# Altium PCB MACH_VXL.PcbDoc
Units mm, origin at the board's own origin, x right, y up, seen from the top; angles counter-clockwise.
Board outline 96.27 x 82.04 mm, 2 copper layers (Top Layer, Bottom Layer); 22 components, 27 nets, 107 pads, 9 vias.
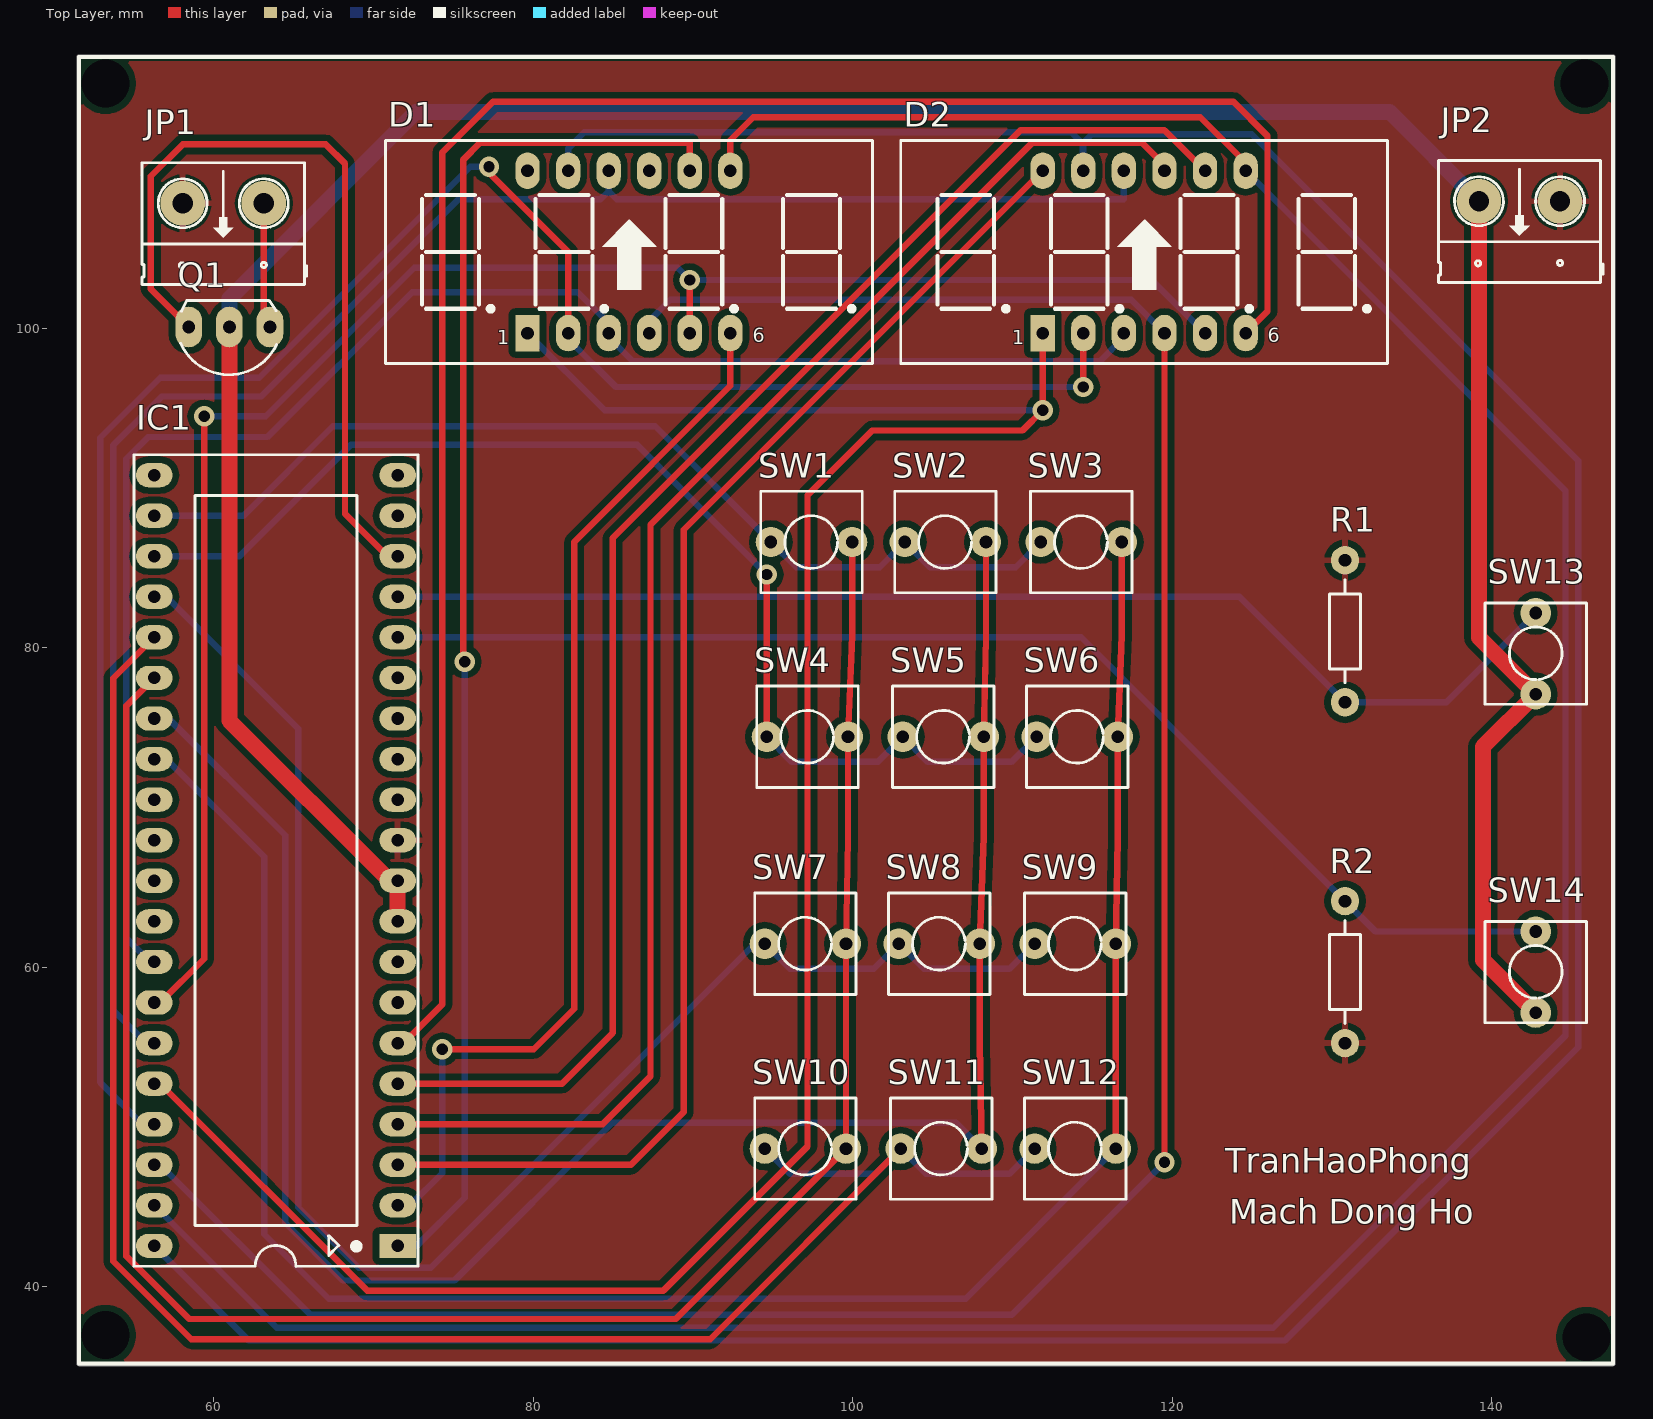
[diagram p0: Top Layer view]
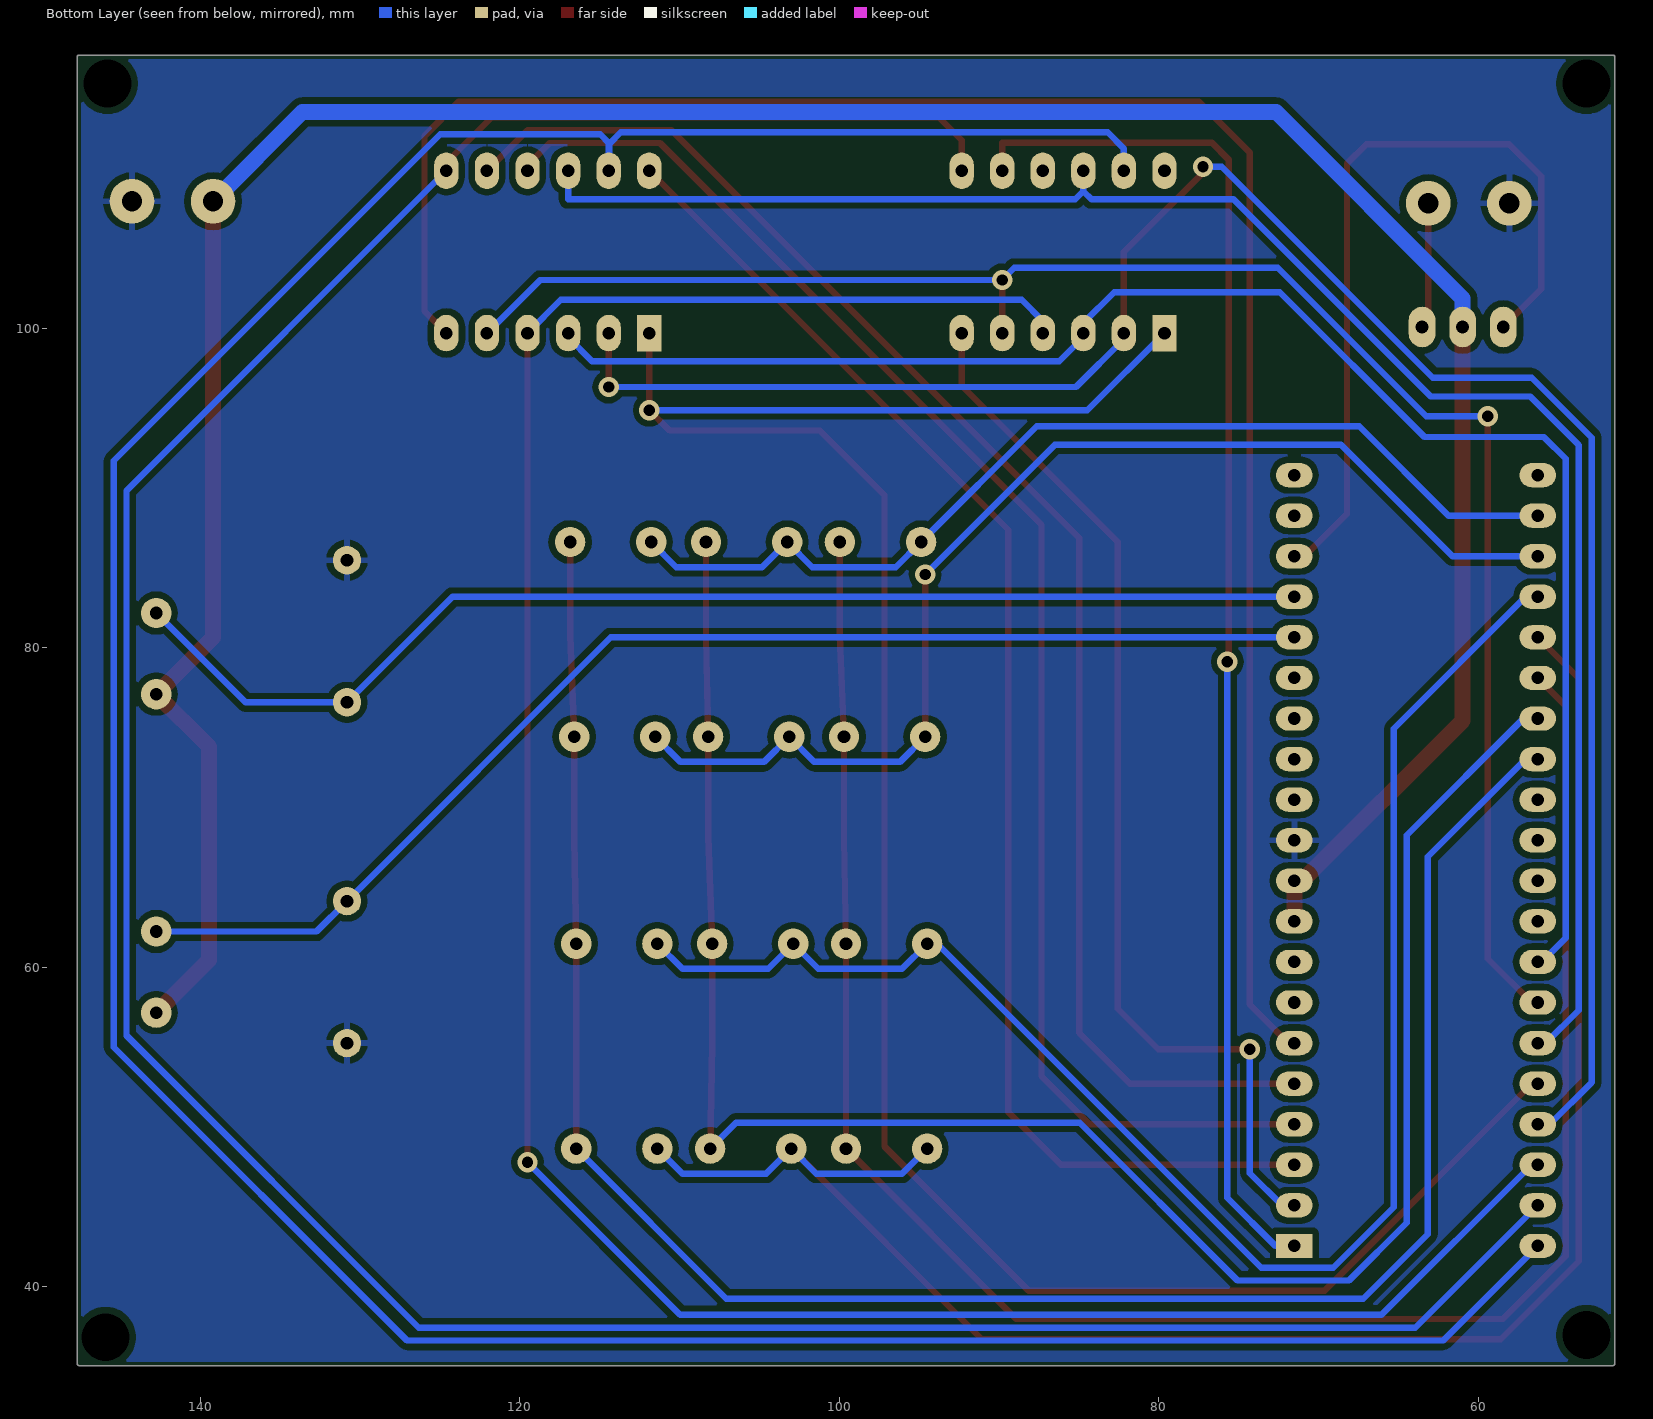
[diagram p1: Bottom Layer view, seen from below]

## Layer stack, top to bottom
Top Solder: solder mask 0.0102, Solder Resist, Dk 3.5
Top Layer: signal copper 0.0356
Dielectric 1: dielectric 0.32, FR-4, Dk 4.8
Bottom Layer: signal copper 0.0356
Bottom Solder: solder mask 0.0102, Solder Resist, Dk 3.5

## Board outline
51.435,35.179 ccw(c51.562,35.179) 51.562,35.052 147.574,35.052 ccw(c147.574,35.179) 147.701,35.179 147.701,116.967 ccw(c147.574,116.967) 147.574,117.094 51.562,117.094 ccw(c51.562,116.967) 51.435,116.967

## Design rules (kind name [scope] priority, off if disabled: settings)
Clearance [All] p1: gap=0.4 ignorepadtopadclearanceinfootprint=FALSE
PolygonConnect [InNet('GND')] p1: connectstyle=Relief reliefconductorwidth=0.4 reliefentries=4 polygonreliefangle="90 Angle" airgapwidth=0.4
RoutingVias [All] p1: holewidth=0.711 width=1.27 viastyle="Through Hole" minholewidth=0.711 minwidth=1.27 maxholewidth=0.711 maxwidth=1.27
SolderMaskExpansion [All] p1: expansion=0.102
Width [All] p1: maxlimit=1 minlimit=0.4 preferedwidth=0.4
30 further rules are at their usual default settings.

## Components (designator, comment, footprint, x,y, rotation, side; value= is the part's Value field where it differs from the comment)
D1 "" LED7SEG-4-0.36 86.106,105.029 r0 top
D2 "" LED7SEG-4-0.36 118.364,105.029 r0 top
IC1 "ATMEL 16L" DIP40/W0.6 71.501,42.545 r90 top value="Atmega 16L"
JP1 "Header 2_1" HED2 63.119,107.823 r180 top value="Header 2"
JP2 "Header 2_1" HED2 144.272,107.95 r180 top value="Header 2"
Q1 "C1815" QTO-92 60.96,100.076 r180 top
R1 "1k" R1/4W 130.81,85.471 r270 top value="R1/4W - 1K"
R2 "1k" R1/4W 130.81,55.245 r90 top value="R1/4W - 1K"
SW1 "SW" SW2 94.869,86.614 r0 top value="SW chip 2 pin"
SW2 "SW" SW2 103.251,86.614 r0 top value="SW chip 2 pin"
SW3 "SW" SW2 111.76,86.614 r0 top value="SW chip 2 pin"
SW4 "SW" SW2 94.615,74.422 r0 top value="SW chip 2 pin"
SW5 "SW" SW2 103.124,74.422 r0 top value="SW chip 2 pin"
SW6 "SW" SW2 111.506,74.422 r0 top value="SW chip 2 pin"
SW7 "SW" SW2 94.488,61.468 r0 top value="SW chip 2 pin"
SW8 "SW" SW2 102.87,61.468 r0 top value="SW chip 2 pin"
SW9 "SW" SW2 111.379,61.468 r0 top value="SW chip 2 pin"
SW10 "SW" SW2 94.488,48.641 r0 top value="SW chip 2 pin"
SW11 "SW" SW2 102.997,48.641 r0 top value="SW chip 2 pin"
SW12 "SW" SW2 111.379,48.641 r0 top value="SW chip 2 pin"
SW13 "SW" SW2 142.748,82.169 r270 top value="SW chip 2 pin"
SW14 "SW" SW2 142.748,62.23 r270 top value="SW chip 2 pin"

## Footprints (in the part's own frame and the unit in brackets; to place one, negate y for a bottom-side part, rotate by r counter-clockwise, add the part's x,y. Pads: shape width x height; smd on the part's side, far side on the other; paste and mask are expansions set on the pad)
DIP40/W0.6 [mil] "40 PIN, W 600mil, Pin to pin 100mil"
  rect 60x90 hole 31: 1(0,0)
  oval 60x90 hole 31: 2(100,0) 3(200,0) 4(300,0) 5(400,0) 6(500,0) 7(600,0) 8(700,0) 9(800,0) 10(900,0) 11(1000,0) 12(1100,0) 13(1200,0) 14(1300,0) 15(1400,0) 16(1500,0) 17(1600,0) 18(1700,0) 19(1800,0) 20(1900,0) 21(1900,600) 22(1800,600) 23(1700,600) 24(1600,600) 25(1500,600) 26(1400,600) 27(1300,600) 28(1200,600) 29(1100,600) 30(1000,600) 31(900,600) 32(800,600) 33(700,600) 34(600,600) 35(500,600) 36(400,600) 37(300,600) 38(200,600) 39(100,600) 40(0,600)
  silkscreen extent -50,-50 1950,650, body extent -82,-10 1982,600, height 224
HED2 [mil] "Header 2, 2 pin, hight 300mil, Pin to Pin 200, Colour Green"
  round 110 hole 50: 1(0,0) 2(200,0)
  silkscreen extent -106,-100 300,200, body extent -92,-140 302,155, height 394
LED7SEG-4-0.36 [mil]
  rect 60x90 hole 31: 1(-255,-210)
  oval 60x90 hole 31: 2(-155,-210) 3(-55,-210) 4(45,-210) 5(145,-210) 6(245,-210) 7(245,190) 8(145,190) 9(45,190) 10(-55,190) 11(-155,190) 12(-255,190)
  silkscreen extent -605,-285 595,265, body extent -596,-291 586,260, height 276
QTO-92 [mil] "TO-92"
  oval 66x100 hole 32: 1(-100,0) 2(0,0) 3(100,0)
  silkscreen extent -117,-65 120,118, body extent -109,-66 109,95, height 245
R1/4W [mil] "R 1/4W, 2 Pin, 350mil"
  round 70 hole 31: 1(0,0) 2(350,0)
  silkscreen extent 48,-38 302,38, body extent -40,-47 386,47, height 111
SW2 [mil] "SW button 2pin, 250x 250 mil"
  round 75 hole 31: 1(0,0) 2(200,0)
  silkscreen extent -25,-125 225,125

## Part data
D1 D2: library part LED7SEG-A-0.36-4DIGIT, "4 digit 7 segment anot", Category=LED, Solder=WAVE
IC1: library part Atmega16L, "8-Bit AVR Microcontroller with 16K Bytes of In-System Programmable Flash Memory"
JP1 JP2: "Header, 2-Pin", Manufacturer="Generic Components", Class=Connector
Q1: "NPN 600mW, ECB", =C2383
R1 R2: library part R1/4W, "Resistor 1/4W"
SW1 SW2 SW3 SW4 SW5 SW6 SW7 SW8 SW9 SW10 SW11 SW12 SW13 SW14: library part SW2, "Switch button 2 pin"

## Free pads (board coordinates)
  round 1.524 hole 3: 2(53.213,36.957) 3(145.923,36.83) 4(145.796,115.316) 5(53.213,115.316)

## Via types
v1: diameter 1.27, hole 0.711, Top Layer to Bottom Layer, 9 vias

## Nets (pads, with @x,y where several pads share a name; then routed paths per layer and width w, separated by ;. In a path a pad name is that pad's centre, name@x,y a point inside that pad or via, vN(x,y) a via of type N, cw(c..) or ccw(c..) an arc to the next point about the centre after c; other vN are vias at no path point)
A: D1.11 D2.11 IC1.40 | length 213.4
  Bottom Layer w0.4: IC1.40 62.179,36.627 127.051,36.627 145.415,54.991 145.415,91.694 124.968,112.141 114.96,112.141 114.376,111.557 ; D1.11 82.169,111.252 83.185,112.268 113.665,112.268 114.376,111.557 ; 114.376,111.557 114.427,111.506 D2.11 114.376,111.557
B: D1.7 D2.7 IC1.39 | length 198
  Top Layer w0.4: D1.7 92.329,111.76 93.767,113.198 121.752,113.198 124.587,110.363 D2.7
  Bottom Layer w0.4: IC1.39 63.919,37.427 126.327,37.427 144.615,55.715 144.615,89.827 D2.7
BAO_THUC: IC1.17 R1.2 SW13.1 | length 76.3
  Bottom Layer w0.4: IC1.17 124.206,83.185 R1.2 137.16,76.581 SW13.1
BELL: IC1.18 Q1.3 | length 50.2
  Top Layer w0.4: Q1.3 56.042,102.454 56.042,109.509 58.039,111.506 67.005,111.506 68.199,110.312 68.199,88.392 70.866,85.725 IC1.18
C: D1.4 D2.4 IC1.38 | length 157.4
  Top Layer w0.4: v1(119.507,47.777) D2.4
  Bottom Layer w0.4: IC1.38 56.642,47.625 66.04,38.227 109.957,38.227 v1(119.507,47.777) ; D1.4 87.249,100.457 88.57,101.778 117.424,101.778 D2.4
C0: IC1.26 SW1.2 SW4.2 SW7.2 SW10.2 | length 126
  Top Layer w0.4: IC1.26 54.508,76.352 54.508,41.91 58.445,37.973 88.9,37.973 SW10.2 SW7.2 99.695,68.072 SW4.2 99.949,80.772 SW1.2
C1: IC1.27 SW2.2 SW5.2 SW8.2 SW11.2 | length 123.3
  Top Layer w0.4: SW11.2 107.95,55.194 SW8.2 108.204,68.199 SW5.2 108.331,80.645 SW2.2
  Bottom Layer w0.4: IC1.27 57.15,75.565 64.465,68.25 64.465,43.993 68.075,40.383 75.054,40.383 84.938,50.267 106.451,50.267 SW11.2
C2: IC1.28 SW3.2 SW6.2 SW9.2 SW12.2 | length 129.9
  Top Layer w0.4: SW12.2 SW9.2 116.586,68.072 SW6.2 116.84,80.772 SW3.2
  Bottom Layer w0.4: IC1.28 57.023,73.025 63.144,66.904 63.144,43.282 67.183,39.243 107.061,39.243 SW12.2
D: D1.2 D2.2 IC1.37 | length 125.9
  Top Layer w0.4: v1(77.216,110.109) 77.216,109.728 82.169,104.775 D1.2 ; v1(114.427,96.317) D2.2
  Bottom Layer w0.4: IC1.37 55.499,50.165 52.883,52.781 52.883,93.142 56.642,96.901 62.84,96.901 76.048,110.109 v1(77.216,110.109) ; D1.2 82.169,99.314 85.166,96.317 v1(114.427,96.317)
DP: D1.3 D2.3 IC1.33 | length 102.3
  Bottom Layer w0.4: IC1.33 56.007,60.325 54.508,61.824 54.508,91.821 55.88,93.193 63.348,93.193 72.415,102.26 82.779,102.26 84.709,100.33 D1.3 84.709,99.441 86.208,97.942 115.468,97.942 116.967,99.441 D2.3
E: D1.1 D2.1 IC1.36 | length 146.9
  Top Layer w0.4: IC1.36 56.642,52.705 69.596,39.751 88.138,39.751 97.155,48.768 97.155,89.535 101.219,93.599 110.617,93.599 v1(111.887,94.869) 111.887,99.492 111.785,99.593 D2.1
  Bottom Layer w0.4: D1.1 84.455,94.869 v1(111.887,94.869)
F: D1.10 D2.10 IC1.35 | length 111.9
  Bottom Layer w0.4: IC1.35 55.753,55.245 53.696,57.302 53.696,92.685 56.734,95.723 62.957,95.723 75.311,108.077 84.201,108.077 84.709,108.585 ; D1.10 84.709,108.585 ; D2.10 116.967,108.077 85.217,108.077 84.709,108.585
G: D1.5 D2.5 IC1.34 | length 109.8
  Top Layer w0.4: IC1.34 56.642,57.785 59.385,60.528 v1(59.385,94.488) ; D1.5 v1(89.789,103.022)
  Bottom Layer w0.4: v1(59.385,94.488) 63.246,94.488 72.542,103.784 89.027,103.784 v1(89.789,103.022) 118.72,103.022 D2.5
GND: IC1.11 JP1.2 JP2.1 R1.1 R2.1
H0: IC1.22 SW1.1 SW2.1 SW3.1 | length 63.4
  Bottom Layer w0.4: IC1.22 61.849,88.265 67.437,93.853 87.63,93.853 SW1.1 96.444,85.039 101.676,85.039 SW2.1 104.826,85.039 110.185,85.039 SW3.1
H1: IC1.23 SW4.1 SW5.1 SW6.1 | length 74.3
  Top Layer w0.4: SW4.1 v1(94.615,84.582)
  Bottom Layer w0.4: IC1.23 61.595,85.725 68.58,92.71 86.487,92.71 v1(94.615,84.582) ; SW4.1 96.19,72.847 101.549,72.847 SW5.1 104.699,72.847 109.931,72.847 SW6.1
H2: IC1.24 SW7.1 SW8.1 SW9.1 | length 101.1
  Bottom Layer w0.4: IC1.24 57.023,83.185 65.278,74.93 65.278,44.958 69.053,41.183 73.563,41.183 93.848,61.468 SW7.1 96.063,59.893 101.295,59.893 SW8.1 104.445,59.893 109.804,59.893 SW9.1
H3: IC1.25 SW10.1 SW11.1 SW12.1 | length 115.9
  Top Layer w0.4: IC1.25 53.696,78.08 53.696,41.591 58.584,36.703 91.059,36.703 SW11.1
  Bottom Layer w0.4: SW10.1 96.063,47.066 101.422,47.066 SW11.1 104.572,47.066 109.804,47.066 SW12.1
L1: D1.8 IC1.1 | length 86.8
  Top Layer w0.4: v1(75.692,79.121) 75.692,79.502 75.616,79.578 75.616,110.566 76.657,111.608 89.789,111.608 D1.8
  Bottom Layer w0.4: IC1.1 72.678,42.545 75.692,45.559 v1(75.692,79.121)
L2: D1.6 IC1.2 | length 67
  Top Layer w0.4: v1(74.295,54.864) 80.01,54.864 82.55,57.404 82.55,86.614 92.329,96.393 D1.6
  Bottom Layer w0.4: IC1.2 72.276,45.085 74.295,47.104 v1(74.295,54.864)
L3: D2.12 IC1.3 | length 87.5
  Top Layer w0.4: IC1.3 86.106,47.625 89.408,50.927 89.408,87.376 D2.12
L4: D2.9 IC1.4 | length 95
  Top Layer w0.4: IC1.4 84.328,50.165 87.325,53.162 87.325,87.706 111.217,111.598 118.11,111.598 119.507,110.201 D2.9 D2.9@119.253,110.109
L5: D2.8 IC1.5 | length 94.5
  Top Layer w0.4: IC1.5 81.788,52.705 84.963,55.88 84.963,86.868 110.493,112.398 119.504,112.398 D2.8
L6: D2.6 IC1.6 | length 123.9
  Top Layer w0.4: IC1.6 71.882,55.245 74.295,57.658 74.295,110.998 77.47,114.173 123.825,114.173 125.959,112.039 125.959,101.067 D2.6
NetJP1_1: JP1.1 Q1.1 | length 7.9
  Top Layer w0.4: JP1.1 63.119,100.457 Q1.1
PAUSE: IC1.16 R2.2 SW14.1 | length 78.9
  Bottom Layer w0.4: IC1.16 114.3,80.645 R2.2 132.715,62.23 SW14.1
VCC: IC1.9 IC1.10 JP2.2 Q1.2 SW13.2 SW14.2 | length 184
  Top Layer w0.4: IC1.10@70.993,65.405 IC1.10
  Top Layer w1: Q1.2 60.96,75.438 IC1.10@70.993,65.405 ; IC1.9 IC1.10 ; JP2.2 139.192,80.645 SW13.2 139.446,73.787 139.446,60.452 SW14.2
  Bottom Layer w1: Q1.2 60.96,101.854 72.644,113.538 133.604,113.538 JP2.2
pads on no net: D1.9 D1.12 IC1.7 IC1.8 IC1.12 IC1.13 IC1.14 IC1.15 IC1.19 IC1.20 IC1.21 IC1.29 IC1.30 IC1.31 IC1.32

## Polygon pours and split planes (outlines as drawn)
GND on Top Layer "Bottom Layer-No Net" (solid, remove dead copper, pour order 0): 51.689,116.84 51.816,116.713 147.447,116.713 147.447,35.306 51.689,35.306
GND on Bottom Layer "Bottom Layer-No Net" (solid, remove dead copper, pour order 2): 51.689,116.84 147.447,116.84 147.447,35.306 51.689,35.306

## Silkscreen, mask and mechanical layers (free items; w line width, h text height)
Top Overlay:
  lines w0.254: 51.562,35.179 75.12,35.179 124.015,35.179 147.574,35.179 147.574,116.967 51.562,116.967 51.562,35.179
  text "TranHaoPhong" at 123.317,47.117 h1.52
  text "Mach Dong Ho" at 123.571,43.942 h1.52

## Text inside footprints (layer, text, board x,y; h text height)
D1: Top Overlay "1" at 77.724,98.679 h1.5; Top Overlay "6" at 93.726,98.806 h1.5
D2: Top Overlay "1" at 109.982,98.679 h1.5; Top Overlay "6" at 125.984,98.806 h1.5